# Altium PCB Usb_Adapter.PcbDoc
Units mm, origin at the board's own origin, x right, y up, seen from the top; angles counter-clockwise.
Board outline 11.45 x 10.51 mm, 2 copper layers (Top Layer, Bottom Layer); 4 components, 0 nets, 38 pads, 5 vias.
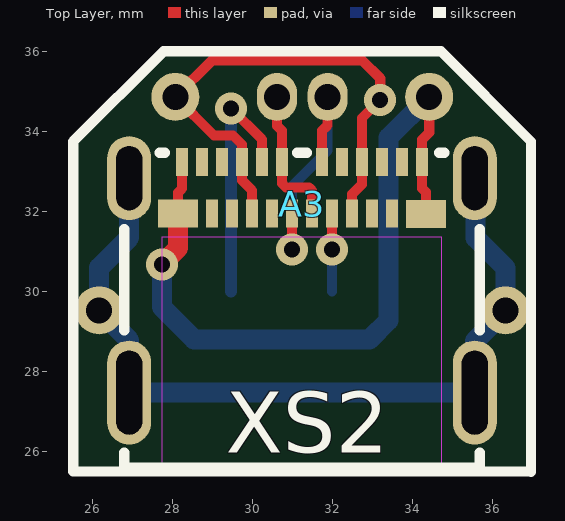
[diagram p0: Top Layer view]
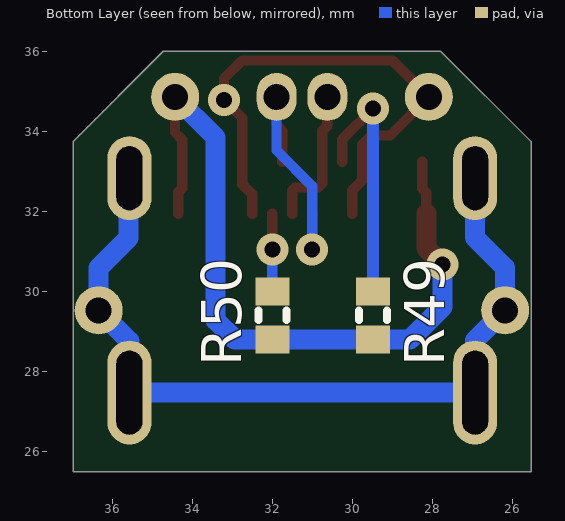
[diagram p1: Bottom Layer view, seen from below]

## Layer stack, top to bottom
Top Solder: solder mask 0.0102, Solder Resist, Dk 3.5
Top Layer: signal copper 0.0356
Dielectric 1: dielectric 0.32, FR-4, Dk 4.8
Bottom Layer: signal copper 0.0356
Bottom Solder: solder mask 0.0102, Solder Resist, Dk 3.5

## Board outline
25.526,25.499 25.526,33.754 27.79,36.009 34.722,36.009 36.973,33.749 36.973,25.499

## Design rules (kind name [scope] priority, off if disabled: settings)
Clearance [All] p1: gap=0.254 ignorepadtopadclearanceinfootprint=FALSE except(0: Arc-Hole Track-Hole SMDPad-Hole THPad-Hole Via-Hole Fill-Hole Poly-Hole Region-Hole Text-Hole)
PolygonConnect [All] p1: connectstyle=Relief reliefconductorwidth=0.254 reliefentries=4 polygonreliefangle="90 Angle" airgapwidth=0.254
RoutingVias [All] p1: holewidth=0.711 width=1.27 viastyle="Through Hole" minholewidth=0.711 minwidth=1.27 maxholewidth=0.711 maxwidth=1.27
SolderMaskExpansion [All] p1: expansion=0.102
Width [All] p1: maxlimit=0.254 minlimit=0.254 preferedwidth=0.254
30 further rules are at their usual default settings.

## Components (designator, comment, footprint, x,y, rotation, side; value= is the part's Value field where it differs from the comment)
A3 "USB-C_Adapter" Usb-C_Adapter 31.256,31.056 r0 top
R49 "Res" RES_0603-1608 29.473,29.405 r270 bottom value="5.1 кОм"
R50 "Res" RES_0603-1608 31.996,29.405 r270 bottom value="5.1 кОм"
XS2 "USB Type C" 105450-0101 31.246,32.834 r0 top

## Footprints (in the part's own frame and the unit in brackets; to place one, negate y for a bottom-side part, rotate by r counter-clockwise, add the part's x,y. Pads: shape width x height; smd on the part's side, far side on the other; paste and mask are expansions set on the pad)
105450-0101 [mm] "Molex USB Type C Surface Mount Receptacle"
  rect 0.3x0.7 smd: A1(-3,0.41) A2(-2.5,0.41) A3(-2,0.41) A4(-1.5,0.41) A5(-1,0.41) A6(-0.5,0.41) A7(0.5,0.41) A8(1,0.41) A9(1.5,0.41) A10(2,0.41) A11(2.5,0.41) A12(3,0.41) B2(2.25,-0.889) B3(1.75,-0.889) B4(1.25,-0.889) B5(0.75,-0.889) B6(0.25,-0.889) B7(-0.25,-0.889) B8(-0.75,-0.889) B9(-1.25,-0.889) B10(-1.75,-0.889) B11(-2.25,-0.889)
  rect 1x0.7 smd: B1(3.1,-0.891) B12(-3.1,-0.889)
  oval 1.1x2.6 hole 2.1 slot 0.65 at 0 deg: S(-4.32,-5.36) S(4.32,-5.36)
  oval 1.1x2.1 hole 1.6 slot 0.65 at 0 deg: S(-4.32,0) S(4.32,0)
  Top Layer keep-out region: 3.5,-1.48 -3.5,-1.48 -3.5,-7.13 3.5,-7.13
  silkscreen extent -4.44,-7.24 4.44,0.64, body extent -4.47,-7.24 4.47,0.66, height 3.22
RES_0603-1608 [mm] "0603 (1608 metric): 1.6 mm x 0.8 mm (0.063 in x 0.031 in)"
  rect 0.7x0.85 smd: 1(-0.6,0) 2(0.6,0)
  silkscreen extent -0.12,-0.35 0.12,0.35, body extent -0.8,-0.4 0.8,0.4, height 0.4
Usb-C_Adapter [mm]
  round 1.2 hole 0.65: 1(-3.175,3.81) 4(3.17,3.81) S(-5.08,-1.524) S(5.08,-1.528)
  oval 1x1.2 hole 0.65: 2(-0.635,3.81) 3(0.632,3.81)
  silkscreen extent -5.73,-5.56 5.72,4.95

## Part data
R49 R50: "Резистор постоянный", Case=0603, Power="0.125 W", Tolerance=5%, BomGroup=Резисторы, BomTitle="Резистор SMD"
XS2: library part USB-C_Generic, BomGroup=Соединители, BomTitle="Гнездо USB тип C", Type=105450-0101

## Via types
v1: diameter 0.8, hole 0.4, Top Layer to Bottom Layer, tented both sides, 5 vias

## Nets (pads, with @x,y where several pads share a name; then routed paths per layer and width w, separated by ;. In a path a pad name is that pad's centre, name@x,y a point inside that pad or via, vN(x,y) a via of type N, cw(c..) or ccw(c..) an arc to the next point about the centre after c; other vN are vias at no path point)
pads on no net: A3.1 A3.2 A3.3 A3.4 A3.S R49.1 R49.2 R50.1 R50.2 XS2.A1 XS2.A2 XS2.A3 XS2.A4 XS2.A5 XS2.A6 XS2.A7 XS2.A8 XS2.A9 XS2.A10 XS2.A11 XS2.A12 XS2.B1 XS2.B2 XS2.B3 XS2.B4 XS2.B5 XS2.B6 XS2.B7 XS2.B8 XS2.B9 XS2.B10 XS2.B11 XS2.B12 XS2.S
copper on no net: | length 71.8
  Top Layer w0.254: v1(27.746,30.675) v1@27.746,30.683 ; 28.146,31.945 28.146,32.473 28.246,32.573 28.246,33.244 ; v1(29.473,34.577) 30.246,33.804 30.246,33.244 ; 29.996,31.945 29.996,32.53 29.746,32.78 29.746,33.244 29.746,33.678 29.523,33.901 29.046,33.901 28.081,34.866 28.988,35.773 32.757,35.773 33.201,35.329 v1(33.201,34.794) 32.746,34.339 32.746,33.244 32.746,32.684 32.496,32.434 32.496,31.945 ; 30.621,34.866 30.621,34.144 30.746,34.019 30.746,33.244 30.746,32.704 30.848,32.602 31.424,32.602 31.496,32.53 31.496,31.945 ; 30.996,31.945 30.997,31.944 v1(30.997,31.056) ; 31.746,33.244 31.746,34.019 31.888,34.161 31.888,34.866 ; v1(31.996,31.056) 31.996,31.945 31.996,31.735 ; 34.346,31.943 34.346,32.483 34.246,32.583 34.246,33.244 34.246,33.797 34.426,33.977 34.426,34.866
  Top Layer w0.5: v1@27.746,30.683 28.146,31.083 28.146,31.945
  Bottom Layer w0.254: v1(30.997,31.056) 30.997,32.635 31.888,33.526 31.888,34.866 ; 31.996,30.005 v1(31.996,31.056)
  Bottom Layer w0.3: 29.473,30.005 v1(29.473,34.577)
  Bottom Layer w0.5: 26.926,32.834 26.926,31.347 26.176,30.597 26.176,29.532 26.926,28.782 26.926,27.474 35.566,27.474 35.566,28.758 36.336,29.528 36.336,30.593 35.586,31.343 35.586,32.83 ; v1(27.746,30.675) 27.746,29.608 28.549,28.805 29.473,28.805 31.996,28.805 32.937,28.805 33.41,29.278 33.41,33.85 34.426,34.866

## Silkscreen, mask and mechanical layers (free items; w line width, h text height)
Mechanical 1:
  the board outline again, w0.254